# EAGLE board multiMicro_base_64pin (EAGLE 6.1)
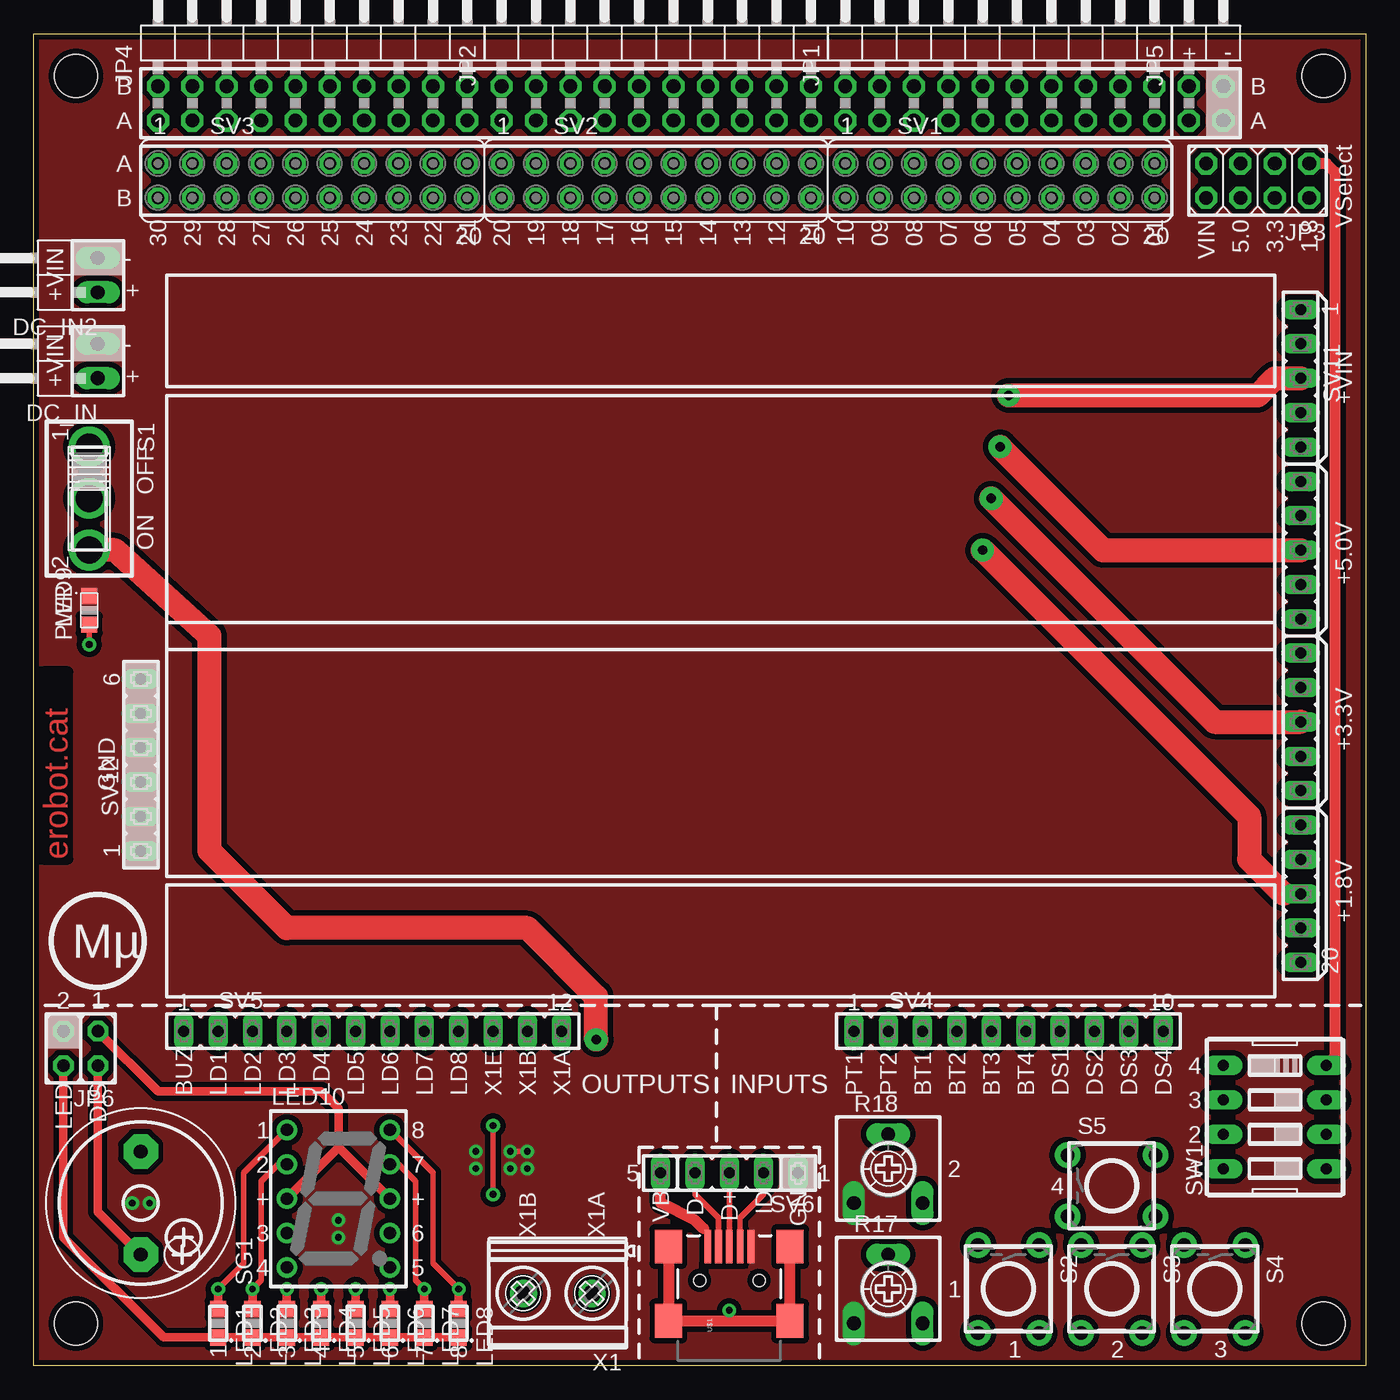
[diagram p0: board, top side]
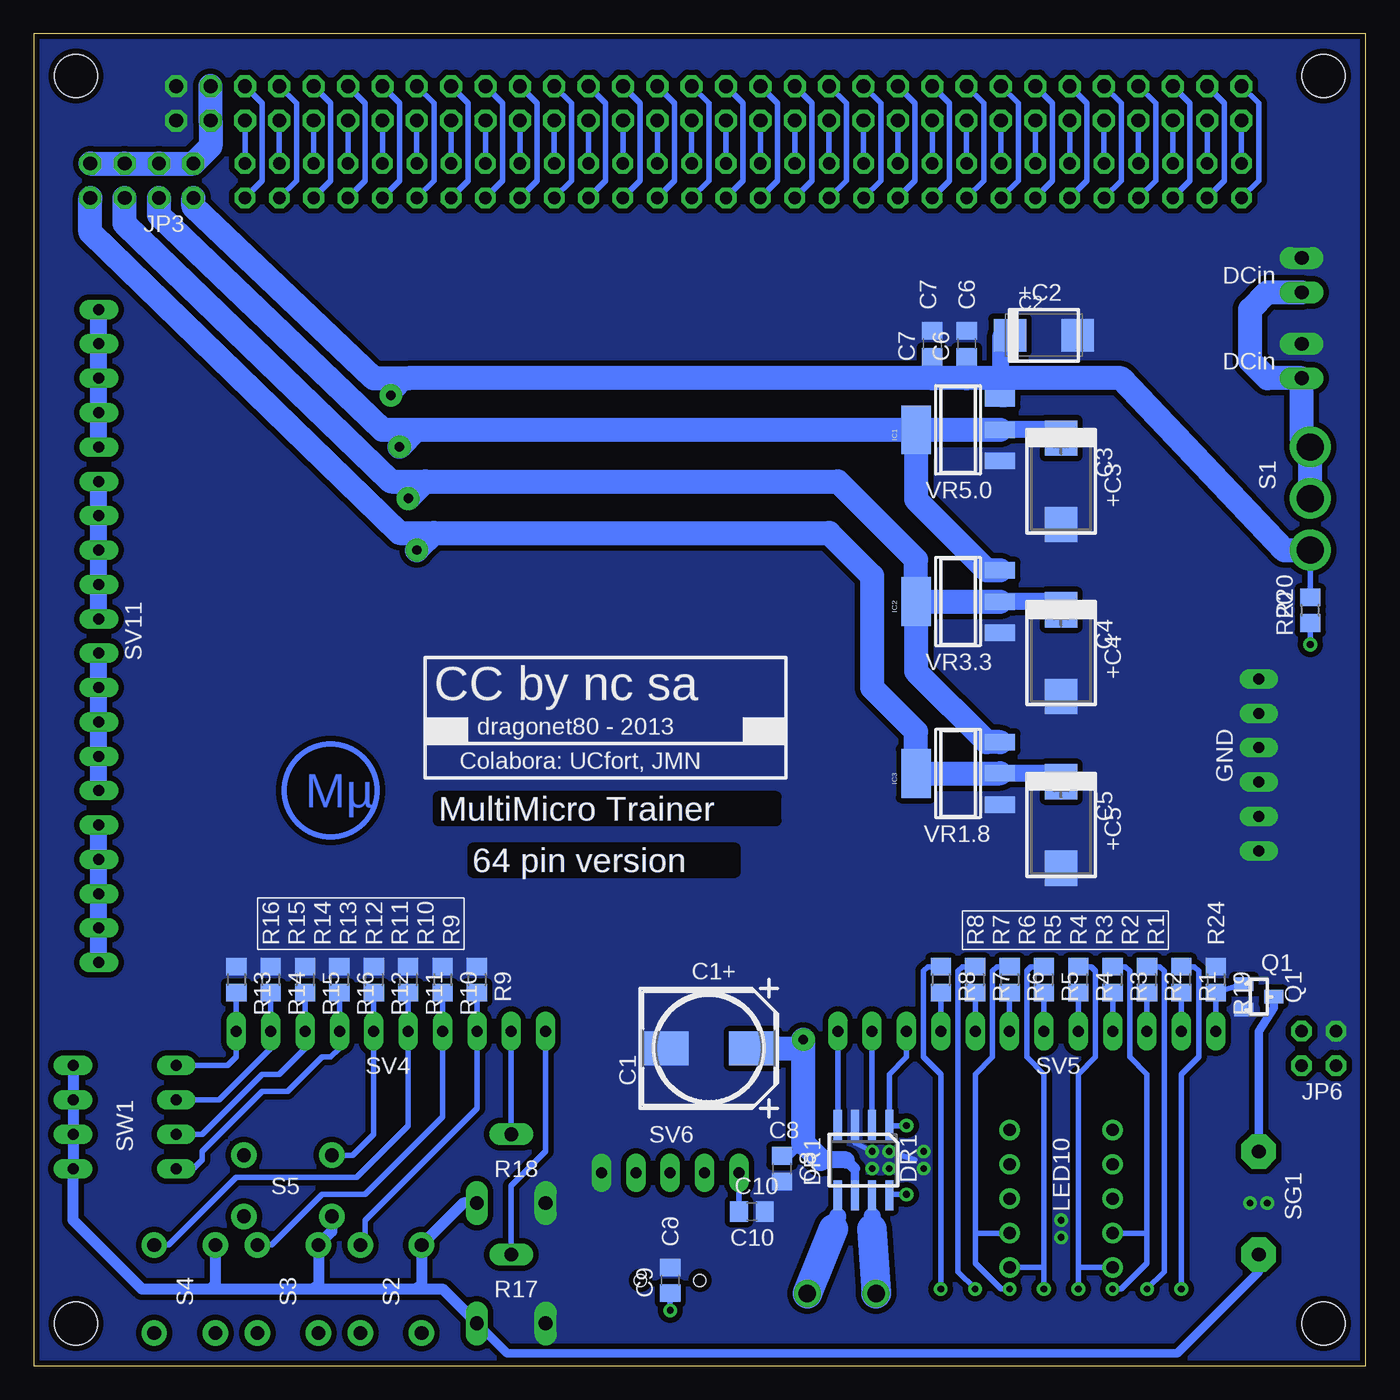
[diagram p1: board, bottom side, seen from below]

Size 98.44 x 98.44 mm. Coordinates in mm from the lower left corner, seen from the top.
Outline: 0,98.44 98.44,98.44 98.44,0 0,0 0,98.44
Copper layers (1*16): Top 0.035mm / dielectric 1.5mm / Bottom 0.035mm
Design rules: minimum track width 8mil, minimum drill 20mil, track to track 8mil, track to pad 8mil, pad to pad 8mil, via to via 8mil, smd to smd 8mil, copper to edge 10mil, drill to drill 8mil, minimum pad ring 12mil, minimum via ring 10mil, stop-mask expansion 4mil, vias tented up to drill 25mil, thermal gap 10mil
Holes 3.2 mm at 3.12,3.12 3.12,95.31 95.31,3.12 95.31,95.31

## Footprints (pad centres in the part's own frame; a part is rotated, then mirrored left to right if it is on the bottom)
140CLH-0810 = smd 3.5 x 2.5: + 3.25,0; - -3.25,0
SMC_C = smd 2.4 x 2.4: + -2.5,0; - 2.5,0
CT7343 = smd 2.6 x 2.4: + -3.2,0; - 3.2,0
C0805 = smd 1.3 x 1.5: 1 -0.95,0; 2 0.95,0
1X02/90 = drill 1.016 long: 1 -1.27,-3.81; 2 1.27,-3.81
SOIC08 = smd 0.6 x 2.2: 1 -1.905,-2.6; 2 -0.635,-2.6; 3 0.635,-2.6; 4 1.905,-2.6; 5 1.905,2.6; 6 0.635,2.6; 7 -0.635,2.6; 8 -1.905,2.6
SOT223 = smd 1.219 x 2.235: 1 -2.311,-3.099; 2 0,-3.099; 3 2.311,-3.099 | smd 3.6 x 2.2: 4 0,3.099
2X10/90 = drill 1.016 octagon: 1 -11.43,-6.35; 2 -11.43,-3.81; 3 -8.89,-6.35; 4 -8.89,-3.81; 5 -6.35,-6.35; 6 -6.35,-3.81; 7 -3.81,-6.35; 8 -3.81,-3.81; 9 -1.27,-6.35; 10 -1.27,-3.81; 11 1.27,-6.35; 12 1.27,-3.81; 13 3.81,-6.35; 14 3.81,-3.81; 15 6.35,-6.35; 16 6.35,-3.81; 17 8.89,-6.35; 18 8.89,-3.81; 19 11.43,-6.35; 20 11.43,-3.81
2X04 = drill 1.016 octagon: 1 -3.81,-1.27; 2 -3.81,1.27; 3 -1.27,-1.27; 4 -1.27,1.27; 5 1.27,-1.27; 6 1.27,1.27; 7 3.81,-1.27; 8 3.81,1.27
2X02/90 = drill 1.016 octagon: 1 -1.27,-6.35; 2 -1.27,-3.81; 3 1.27,-6.35; 4 1.27,-3.81
JP2Q = drill 0.914 octagon: 1 -1.27,-1.27; 2 -1.27,1.27; 3 1.27,-1.27; 4 1.27,1.27
CHIP-LED0805 = smd 1.2 x 1.2: A 0,-1.05; C 0,1.05
SA39-11SRWA = drill 0.9 pad 1.5: 1 -3.81,5.08; 2 -3.81,2.54; 3 -3.81,0; 4 -3.81,-2.54; 5 -3.81,-5.08; 6 3.81,-5.08; 7 3.81,-2.54; 8 3.81,0; 9 3.81,2.54; 10 3.81,5.08
SOT23 = smd 1 x 1.4: 1 -0.95,-1.1; 2 0.95,-1.1; 3 0,1.1
R0805 = smd 1.3 x 1.5: 1 -0.95,0; 2 0.95,0
CA6V = drill 1.016 long: A -2.54,-2.54; E 2.54,-2.54; S 0,2.54
255SB = drill 2: 1 -3.81,0; 2 0,0; 3 3.81,0
TACTILE-PTH = drill 1.016 pad 1.88: 1 -3.251,2.261; 2 3.251,2.261; 3 -3.251,-2.261; 4 3.251,-2.261
F/CM12P = drill 1.016 pad 2.54 octagon: + 3.81,0; - -3.81,0
FE10-2 = drill 0.914 octagon: 1 -11.43,1.27; 2 -11.43,-1.27; 3 -8.89,1.27; 4 -8.89,-1.27; 5 -6.35,1.27; 6 -6.35,-1.27; 7 -3.81,1.27; 8 -3.81,-1.27; 9 -1.27,1.27; 10 -1.27,-1.27; 11 1.27,1.27; 12 1.27,-1.27; 13 3.81,1.27; 14 3.81,-1.27; 15 6.35,1.27; 16 6.35,-1.27; 17 8.89,1.27; 18 8.89,-1.27; 19 11.43,1.27; 20 11.43,-1.27
FE10 = drill 0.813 long: 1 -11.43,0; 2 -8.89,0; 3 -6.35,0; 4 -3.81,0; 5 -1.27,0; 6 1.27,0; 7 3.81,0; 8 6.35,0; 9 8.89,0; 10 11.43,0
FE12 = drill 0.813 long: 1 -13.97,0; 2 -11.43,0; 3 -8.89,0; 4 -6.35,0; 5 -3.81,0; 6 -1.27,0; 7 1.27,0; 8 3.81,0; 9 6.35,0; 10 8.89,0; 11 11.43,0; 12 13.97,0
FE05-1 = drill 0.813 long: 1 -5.08,0; 2 -2.54,0; 3 0,0; 4 2.54,0; 5 5.08,0
FE20 = drill 0.813 long: 1 -24.13,0; 2 -21.59,0; 3 -19.05,0; 4 -16.51,0; 5 -13.97,0; 6 -11.43,0; 7 -8.89,0; 8 -6.35,0; 9 -3.81,0; 10 -1.27,0; 11 1.27,0; 12 3.81,0; 13 6.35,0; 14 8.89,0; 15 11.43,0; 16 13.97,0; 17 16.51,0; 18 19.05,0; 19 21.59,0; 20 24.13,0
FE06 = drill 0.813 long: 1 -6.35,0; 2 -3.81,0; 3 -1.27,0; 4 1.27,0; 5 3.81,0; 6 6.35,0
EDG-04 = drill 0.813 long: 1 -3.81,-3.81; 2 -1.27,-3.81; 3 1.27,-3.81; 4 3.81,-3.81; 5 3.81,3.81; 6 1.27,3.81; 7 -1.27,3.81; 8 -3.81,3.81
USB-MINIB = smd 2.5 x 0.5: D+ 2.5,0; D- 2.5,0.8; GND 2.5,-1.6; ID 2.5,-0.8; VBUS 2.5,1.6 | smd 2.5 x 2: MTN1 -3,4.5; MTN2 2.5,4.5; MTN3 -3,-4.5; MTN4 2.5,-4.5 | hole 0.9: 0,2.2; 0,-2.2
MKDSN1,5/2-5,08 = drill 1.3 pad 2: 1 -2.561,0.025; 2 2.519,0.025

## Placement (x,y rotation side)
C1  [140CLH-0810]  48.55,23.45 0 bottom
C2  10uF  [SMC_C]  23.78,76.16 0 bottom
C3  100uF  [CT7343]  22.51,65.36 270 bottom
C4  100uF  [CT7343]  22.51,52.66 270 bottom
C5  100uF  [CT7343]  22.51,39.96 270 bottom
C6  100nF  [C0805]  29.49,75.52 90 bottom
C7  33pF  [C0805]  32.03,75.52 90 bottom
C8  100nF  [C0805]  43.15,14.56 270 bottom
C9  10nF  [C0805]  51.4,6.31 90 bottom
C10  100nF  [C0805]  45.37,11.39 0 bottom
DC_IN  [1X02/90]  0.92,74.25 90 top
DC_IN2  [1X02/90]  0.92,80.6 90 top
DR1  MCP14E4  [SOIC08]  37.12,15.2 180 bottom
IC1  [SOT223]  30.13,69.17 90 bottom
IC2  [SOT223]  30.13,56.47 90 bottom
IC3  [SOT223]  30.13,43.77 90 bottom
JP1  [2X10/90]  71.41,98.38 0 top
JP2  [2X10/90]  46,98.38 0 top
JP3  [2X04]  90.46,87.59 180 top
JP4  [2X10/90]  20.6,98.38 0 top
JP5  [2X02/90]  86.65,98.38 0 top
JP6  [JP2Q]  3.46,23.45 180 top
LED1  [CHIP-LED0805]  13.62,3.13 180 top
LED2  [CHIP-LED0805]  16.16,3.13 180 top
LED3  [CHIP-LED0805]  18.7,3.13 180 top
LED4  [CHIP-LED0805]  21.24,3.13 180 top
LED5  [CHIP-LED0805]  23.78,3.13 180 top
LED6  [CHIP-LED0805]  26.32,3.13 180 top
LED7  [CHIP-LED0805]  28.86,3.13 180 top
LED8  [CHIP-LED0805]  31.4,3.13 180 top
LED9  [CHIP-LED0805]  4.1,55.84 0 top
LED10  7-SEG_SA39-11SRWA  [SA39-11SRWA]  22.51,12.34 0 top
Q1  BSS123  [SOT23]  7.91,27.26 270 bottom
R1  1K  [R0805]  13.62,28.53 270 bottom
R2  1K  [R0805]  16.16,28.53 270 bottom
R3  1K  [R0805]  18.7,28.53 270 bottom
R4  1K  [R0805]  21.24,28.53 270 bottom
R5  1K  [R0805]  23.78,28.53 270 bottom
R6  1K  [R0805]  26.32,28.53 270 bottom
R7  1K  [R0805]  28.86,28.53 270 bottom
R8  1K  [R0805]  31.4,28.53 270 bottom
R9  10K  [R0805]  65.69,28.53 270 bottom
R10  10K  [R0805]  68.23,28.53 270 bottom
R11  10K  [R0805]  70.77,28.53 270 bottom
R12  10K  [R0805]  73.31,28.53 270 bottom
R13  10K  [R0805]  83.47,28.53 270 bottom
R14  10K  [R0805]  80.93,28.53 270 bottom
R15  10K  [R0805]  78.39,28.53 270 bottom
R16  10K  [R0805]  75.85,28.53 270 bottom
R17  10K  [CA6V]  63.15,5.67 0 top
R18  10K  [CA6V]  63.15,14.56 0 top
R19  10K  [R0805]  11.08,28.53 270 bottom
R20  1K  [R0805]  4.1,55.84 90 bottom
S1  [255SB]  4.1,64.09 270 top
S2  [TACTILE-PTH]  72.04,5.67 270 top
S3  [TACTILE-PTH]  79.66,5.67 270 top
S4  [TACTILE-PTH]  87.28,5.67 270 top
S5  [TACTILE-PTH]  79.66,13.29 0 top
SG1  F/CM12P  [F/CM12P]  7.91,12.02 270 top
SV1  [FE10-2]  71.41,87.59 0 top
SV2  [FE10-2]  46,87.59 0 top
SV3  [FE10-2]  20.6,87.59 0 top
SV4  [FE10]  72.04,24.72 0 top
SV5  [FE12]  25.05,24.72 0 top
SV6  [FE05-1]  51.4,14.24 180 top
SV11  [FE20]  93.63,53.93 270 top
SV12  [FE06]  7.91,44.41 90 top
SW1  [EDG-04]  91.73,18.37 90 top
U$1  USB-MINIB-5PIN  [USB-MINIB]  51.4,6.31 90 top
X1  MKDSN1,5/2-5,08  [MKDSN1,5/2-5,08]  38.7,5.35 180 top

## Library data of the parts
C1-C10 R1-R16 R19 R20 = rcl
DC_IN DC_IN2 JP1-JP5 = pinhead
DR1 = ic-package
IC1-IC3 S2-S5 = SparkFun
JP6 = jumper
LED1-LED9 = led
LED10 = display-kingbright; OC_FARNELL: unknown; OC_NEWARK: unknown
Q1 = transistor-small-signal
R17 R18 = pot
S1 = switch
SG1 = buzzer; OC_FARNELL: unknown; OC_NEWARK: unknown
SV1-SV6 SV11 SV12 = con-lsta; OC_FARNELL: unknown; OC_NEWARK: unknown
SW1 = special
U$1 = SparkFun-Connectors
X1 = con-phoenix-508; MPN: MKDSN 1,5/2-5.08; OC_FARNELL: 1792903; OC_NEWARK: 30M2397

## Nets
+3V3: C4.+ IC2.2 IC2.4 IC3.3 JP3.4 SV11.11 SV11.12 SV11.13 SV11.14 SV11.15
+5V: C3.+ IC1.2 IC1.4 IC2.3 JP3.6 SV11.6 SV11.7 SV11.8 SV11.9 SV11.10
+18V: C5.+ IC3.2 IC3.4 JP3.2 SV11.16 SV11.17 SV11.18 SV11.19 SV11.20
+UB: JP3.1 JP3.3 JP3.5 JP3.7 JP5.1 JP5.2 JP6.2 R17.E R18.E S2.3 S3.3 S4.3 S5.3 SG1.+ SW1.1 SW1.2 SW1.3 SW1.4
N$1: LED1.A LED10.1 R1.1
N$2: LED2.A LED10.2 R2.1
N$3: LED3.A LED10.4 R3.1
N$4: LED4.A LED10.5 R4.1
N$5: R2.2 SV5.3
N$6: R3.2 SV5.4
N$7: R1.2 SV5.2
N$8: R4.2 SV5.5
N$9: LED9.A R20.1
N$10: R18.S SV4.2
N$11: DR1.5 X1.1
N$12: DR1.7 X1.2
N$13: DR1.2 SV5.11
N$14: DR1.4 SV5.12
N$15: DR1.1 DR1.8 SV5.10
N$16: JP6.4 LED1.C LED2.C LED3.C LED4.C LED5.C LED6.C LED7.C LED8.C
N$17: JP6.1 LED10.3 LED10.8
N$18: Q1.3 SG1.-
N$19: SV6.2 U$1.ID
N$20: LED5.A LED10.6 R5.1
N$21: C9.1 U$1.MTN1 U$1.MTN2 U$1.MTN3 U$1.MTN4
N$22: SV6.3 U$1.D+
N$23: SV6.4 U$1.D-
N$24: C10.1 SV6.5 U$1.VBUS
N$42: DC_IN2.1 DC_IN.1 S1.1 S1.2
N$44: LED6.A LED10.7 R6.1
N$45: LED7.A LED10.9 R7.1
N$46: LED8.A LED10.10 R8.1
N$47: R9.2 S2.1 SV4.3
N$48: R10.2 S3.1 SV4.4
N$49: R11.2 S4.1 SV4.5
N$50: R12.2 S5.1 SV4.6
N$55: Q1.1 R19.2 SV5.1
N$57: R17.S SV4.1
N$62: R6.2 SV5.7
N$63: R7.2 SV5.8
N$64: R5.2 SV5.6
N$65: R8.2 SV5.9
N$147: R13.2 SV4.10 SW1.5
N$148: R14.2 SV4.9 SW1.6
N$149: R15.2 SV4.8 SW1.7
N$150: R16.2 SV4.7 SW1.8
P01: JP1.1 SV1.1
P02: JP1.2 SV1.2
P04: JP1.3 SV1.3
P05: JP1.4 SV1.4
P07: JP1.5 SV1.5
P08: JP1.6 SV1.6
P10: JP1.7 SV1.7
P11: JP1.8 SV1.8
P13: JP1.9 SV1.9
P14: JP1.10 SV1.10
P16: JP1.11 SV1.11
P17: JP1.12 SV1.12
P19: JP1.13 SV1.13
P20: JP1.14 SV1.14
P22: JP1.15 SV1.15
P23: JP1.16 SV1.16
P25: JP1.17 SV1.17
P26: JP1.18 SV1.18
P28: JP1.19 SV1.19
P29: JP1.20 SV1.20
P31: JP2.1 SV2.1
P32: JP2.2 SV2.2
P34: JP2.3 SV2.3
P35: JP2.4 SV2.4
P37: JP2.5 SV2.5
P38: JP2.6 SV2.6
P40: JP2.7 SV2.7
P41: JP2.8 SV2.8
P43: JP2.9 SV2.9
P44: JP2.10 SV2.10
P46: JP2.11 SV2.11
P47: JP2.12 SV2.12
P49: JP2.13 SV2.13
P50: JP2.14 SV2.14
P52: JP2.15 SV2.15
P53: JP2.16 SV2.16
P55: JP2.17 SV2.17
P56: JP2.18 SV2.18
P58: JP2.19 SV2.19
P59: JP2.20 SV2.20
P61: JP4.1 SV3.1
P62: JP4.2 SV3.2
P64: JP4.3 SV3.3
P65: JP4.4 SV3.4
P67: JP4.5 SV3.5
P68: JP4.6 SV3.6
P70: JP4.7 SV3.7
P71: JP4.8 SV3.8
P73: JP4.9 SV3.9
P74: JP4.10 SV3.10
P76: JP4.11 SV3.11
P77: JP4.12 SV3.12
P79: JP4.13 SV3.13
P80: JP4.14 SV3.14
P82: JP4.15 SV3.15
P83: JP4.16 SV3.16
P85: JP4.17 SV3.17
P86: JP4.18 SV3.18
P88: JP4.19 SV3.19
P89: JP4.20 SV3.20
V+: C1.+ C2.+ C6.1 C7.1 C8.1 DR1.6 IC1.3 JP3.8 R20.2 S1.3 SV11.1 SV11.2 SV11.3 SV11.4 SV11.5
VSS: C1.- C2.- C3.- C4.- C5.- C6.2 C7.2 C8.2 C9.2 C10.2 DC_IN2.2 DC_IN.2 DR1.3 IC1.1 IC2.1 IC3.1 JP5.3 JP5.4 JP6.3 LED9.C Q1.2 R9.1 R10.1 R11.1 R12.1 R13.1 R14.1 R15.1 R16.1 R17.A R18.A R19.1 SV6.1 SV12.1 SV12.2 SV12.3 SV12.4 SV12.5 SV12.6 U$1.GND

## Tracks (layer width: path | path; a pad name or v marks a point on that pad's centre or on a via)
+3V3  (via drill 0.7 pad 1.68)
  Top 1.778: v70.77,64.09 87.28,47.58 SV11.13
  Bottom 0.406: C4.+ 22.51,56.47
  Bottom 1.27: 22.51,56.47 IC2.2 | SV11.15 SV11.14 SV11.13 SV11.12 SV11.11
  Bottom 1.778: IC2.4 IC2.2 | IC2.4 33.23,51.32 28,46.08 IC3.3 | v70.77,64.09 69.5,65.36 | 69.5,65.36 39.02,65.36 33.23,59.57 IC2.4 | 69.5,65.36 72.04,65.36 91.73,84.41 JP3.4
+5V  (via drill 0.7 pad 1.68)
  Top 1.778: v71.41,67.9 79.03,60.28 SV11.8
  Bottom 0.406: C3.+ 22.51,69.17
  Bottom 1.27: 22.51,69.17 IC1.2 | SV11.10 SV11.9 SV11.8 SV11.7 SV11.6
  Bottom 1.778: IC1.4 IC1.2 | IC1.4 33.23,64.02 28,58.78 IC2.3 | v71.41,67.9 70.14,69.17 | 70.14,69.17 IC1.4 | 70.14,69.17 72.68,69.17 89.19,85.05 JP3.6
+18V  (via drill 0.7 pad 1.68)
  Top 1.27: 92.36,34.88 SV11.18
  Top 1.778: v70.14,60.28 89.82,40.6 89.82,37.42 92.36,34.88
  Bottom 0.406: C5.+ 22.51,43.77
  Bottom 1.27: 22.51,43.77 IC3.2 | SV11.20 SV11.19 SV11.18 SV11.17 SV11.16
  Bottom 1.778: IC3.2 IC3.4 33.23,46.87 36.48,50.12 36.48,58.38 39.66,61.55 68.87,61.55 | 68.87,61.55 v70.14,60.28 | 68.87,61.55 71.41,61.55 94.27,83.78 JP3.2
+UB
  Top 0.61: SG1.+ 4.73,11.39 JP6.2
  Top 0.813: SW1.4 96.17,22.82 96.17,88.22 95.54,88.86 JP3.1
  Bottom 0.61: SG1.+ 7.91,6.94 13.94,0.91 63.47,0.91 R17.E
  Bottom 0.813: SW1.4 SW1.3 SW1.2 SW1.1 95.54,10.75 90.46,5.67 85.38,5.67 | 85.38,5.67 77.76,5.67 | 77.76,5.67 70.14,5.67 | 70.14,5.67 68.23,5.67 R17.E | 70.14,5.67 69.78,6.03 S2.3 66.68,12.02 R18.E | 77.76,5.67 77.4,6.03 S3.3 76.41,9.91 S5.3 | S4.3 85.02,6.03 85.38,5.67
  Bottom 1.778: JP3.1 JP3.3 JP3.5 JP3.7 85.38,90.13 JP5.1 JP5.2
N$1  (via drill 0.5 pad 0.61)
  Top 0.406: LED10.1 15.53,14.24 15.53,7.58 v13.62,5.67
  Top 0.61: v13.62,5.67 LED1.A
  Bottom 0.406: R1.1 12.67,29.48 12.35,29.17 12.35,22.82 13.62,21.55 v13.62,5.67
N$2  (via drill 0.5 pad 0.61)
  Top 0.406: LED10.2 18.06,14.88 16.79,13.61 16.79,6.31 v16.16,5.67
  Top 0.61: v16.16,5.67 LED2.A
  Bottom 0.406: R2.1 15.21,29.48 14.89,29.17 14.89,6.94 v16.16,5.67
N$3  (via drill 0.5 pad 0.61)
  Top 0.61: v18.7,5.67 LED3.A
  Bottom 0.406: R3.1 17.74,29.48 17.43,29.17 17.43,22.82 16.16,21.55 16.16,9.8 | 16.16,9.8 16.16,7.58 18.06,5.67 v18.7,5.67 | LED10.4 16.16,9.8
N$4  (via drill 0.5 pad 0.61)
  Top 0.61: v21.24,5.67 LED4.A
  Bottom 0.406: 21.24,7.26 v21.24,5.67 | LED10.5 21.24,7.26 | R4.1 20.29,29.48 19.97,29.17 19.97,22.82 21.24,21.55 21.24,7.26
N$5
  Bottom 0.406: R2.2 SV5.3
N$6
  Bottom 0.406: R3.2 SV5.4
N$7
  Bottom 0.406: R1.2 SV5.2
N$8
  Bottom 0.406: R4.2 SV5.5
N$9  (via drill 0.5 pad 1.02)
  Top 0.406: v4.1,53.3 LED9.A
  Bottom 0.406: R20.1 v4.1,53.3
N$10
  Bottom 0.406: R18.S SV4.2
N$11
  Bottom 0.406: DR1.5 39.02,12.02
  Bottom 0.61: 39.02,12.02 39.02,11.07
  Bottom 1.27: 39.02,11.07 39.34,10.12
  Bottom 2.184: 39.34,10.12 41.24,5.35 X1.1
N$12
  Bottom 0.61: DR1.7 36.48,11.07
  Bottom 1.27: 36.48,11.07 36.48,10.12
  Bottom 2.184: 36.48,10.12 36.16,5.35 X1.2
N$13
  Bottom 0.406: DR1.2 SV5.11
N$14
  Bottom 0.406: DR1.4 SV5.12
N$15  (via drill 0.5 pad 0.61)
  Top 0.406: v33.94,12.66 v33.94,17.74
  Bottom 0.406: DR1.1 35.21,21.55 33.94,22.82 SV5.10 | 35.15,12.66 v33.94,12.66 | 35.15,17.74 v33.94,17.74
  Bottom 0.61: DR1.8 35.15,12.66 | DR1.1 35.15,17.74
N$16
  Top 0.61: LED8.C LED7.C LED6.C LED5.C LED4.C LED3.C LED2.C LED1.C 9.59,2.08 2.19,9.48 JP6.4
N$17
  Top 0.61: LED10.3 22.51,16.15 | 22.51,16.15 LED10.8 | 22.51,16.15 22.51,19.01 21.24,20.28 9.18,20.28 JP6.1
N$18
  Bottom 0.61: Q1.3 6.81,26.46 7.91,24.72 SG1.-
N$19
  Top 0.406: U$1.ID 52.2,10.92 53.94,12.66 SV6.2
N$20  (via drill 0.5 pad 0.61)
  Top 0.61: v23.78,5.67 LED5.A
  Bottom 0.406: 23.78,7.26 v23.78,5.67 | LED10.6 23.78,7.26 | R5.1 24.73,29.48 25.05,29.17 25.05,22.82 23.78,21.55 23.78,7.26
N$21  (via drill 0.5 pad 0.61)
  Top 0.406: v51.4,4.09 51.4,3.13 51.55,3.13 51.72,3.31
  Top 0.813: U$1.MTN4 U$1.MTN3 51.72,3.31 U$1.MTN1 U$1.MTN2
  Bottom 0.406: C9.1 v51.4,4.09
N$22
  Top 0.406: U$1.D+ SV6.3
N$23
  Top 0.406: U$1.D- 50.6,10.92 48.86,12.66 SV6.4
N$24
  Top 0.406: U$1.VBUS 49.8,9.81 49.5,10.12
  Top 0.813: 49.5,10.12 48.86,10.75 46.32,12.02 SV6.5
  Bottom 0.406: C10.1 SV6.5
N$42
  Bottom 1.778: S1.2 S1.1 4.73,68.54 DC_IN.1 7.27,72.98 8.54,74.25 8.54,78.06 7.27,79.33 DC_IN2.1
N$44  (via drill 0.5 pad 0.61)
  Top 0.61: v26.32,5.67 LED6.A
  Bottom 0.406: R6.1 27.27,29.48 27.59,29.17 27.59,22.82 28.86,21.55 28.86,9.8 | 28.86,9.8 28.86,7.58 26.95,5.67 v26.32,5.67 | LED10.7 28.86,9.8
N$45  (via drill 0.5 pad 0.61)
  Top 0.406: LED10.9 26.95,14.88 28.22,13.61 28.22,6.31 v28.86,5.67
  Top 0.61: v28.86,5.67 LED7.A
  Bottom 0.406: R7.1 29.81,29.48 30.13,29.17 30.13,6.94 v28.86,5.67
N$46  (via drill 0.5 pad 0.61)
  Top 0.406: LED10.10 29.49,14.24 29.49,7.58 v31.4,5.67
  Top 0.61: v31.4,5.67 LED8.A
  Bottom 0.406: R8.1 32.35,29.48 32.67,29.17 32.67,22.82 31.4,21.55 v31.4,5.67
N$47
  Bottom 0.406: R9.2 SV4.3 65.69,19.01 73.95,10.75 73.95,9.48 74.3,9.13 S2.1
N$48
  Bottom 0.406: R10.2 SV4.4 68.23,18.37 73.95,12.66 77.12,12.66 80.85,8.92 S3.1
N$49
  Bottom 0.406: R11.2 SV4.5 70.77,17.74 74.58,13.93 83.47,13.93 88.47,8.92 S4.1
N$50
  Bottom 0.406: R12.2 SV4.6 73.31,17.1 74.86,15.55 S5.1
N$55
  Bottom 0.406: SV5.1 R19.2 Q1.1
N$57
  Bottom 0.406: R17.S 63.15,13.29 60.61,15.83 SV4.1
N$62
  Bottom 0.406: R6.2 SV5.7
N$63
  Bottom 0.406: R7.2 SV5.8
N$64
  Bottom 0.406: R5.2 SV5.6
N$65
  Bottom 0.406: R8.2 SV5.9
N$147
  Bottom 0.406: R13.2 SV4.10 83.47,22.82 84.11,22.18 SW1.5
N$148
  Bottom 0.406: R14.2 SV4.9 80.93,23.45 84.74,19.64 SW1.6
N$149
  Bottom 0.406: R15.2 SV4.8 78.39,23.45 80.3,21.55 81.57,21.55 86.01,17.1 SW1.7
N$150
  Bottom 0.406: R16.2 SV4.7 75.85,23.45 76.48,22.82 77.12,22.82 79.66,20.28 81.57,20.28 86.01,15.83 86.01,15.2 86.65,14.56 SW1.8
P01
  Bottom 0.406: JP1.1 SV1.1
P02
  Bottom 0.406: JP1.2 58.7,93.3 58.7,87.59 SV1.2
P04
  Bottom 0.406: JP1.3 SV1.3
P05
  Bottom 0.406: JP1.4 61.24,93.3 61.24,87.59 SV1.4
P07
  Bottom 0.406: JP1.5 SV1.5
P08
  Bottom 0.406: JP1.6 63.79,93.3 63.79,87.59 SV1.6
P10
  Bottom 0.406: JP1.7 SV1.7
P11
  Bottom 0.406: JP1.8 66.33,93.3 66.33,87.59 SV1.8
P13
  Bottom 0.406: JP1.9 SV1.9
P14
  Bottom 0.406: JP1.10 68.87,93.3 68.87,87.59 SV1.10
P16
  Bottom 0.406: JP1.11 SV1.11
P17
  Bottom 0.406: JP1.12 71.41,93.3 71.41,87.59 SV1.12
P19
  Bottom 0.406: JP1.13 SV1.13
P20
  Bottom 0.406: JP1.14 73.95,93.3 73.95,87.59 SV1.14
P22
  Bottom 0.406: JP1.15 SV1.15
P23
  Bottom 0.406: JP1.16 76.48,93.3 76.48,87.59 SV1.16
P25
  Bottom 0.406: JP1.17 SV1.17
P26
  Bottom 0.406: JP1.18 79.03,93.3 79.03,87.59 SV1.18
P28
  Bottom 0.406: JP1.19 SV1.19
P29
  Bottom 0.406: JP1.20 81.57,93.3 81.57,87.59 SV1.20
P31
  Bottom 0.406: JP2.1 SV2.1
P32
  Bottom 0.406: JP2.2 33.3,93.3 33.3,87.59 SV2.2
P34
  Bottom 0.406: JP2.3 SV2.3
P35
  Bottom 0.406: JP2.4 35.84,93.3 35.84,87.59 SV2.4
P37
  Bottom 0.406: JP2.5 SV2.5
P38
  Bottom 0.406: JP2.6 38.38,93.3 38.38,87.59 SV2.6
P40
  Bottom 0.406: JP2.7 SV2.7
P41
  Bottom 0.406: JP2.8 40.92,93.3 40.92,87.59 SV2.8
P43
  Bottom 0.406: JP2.9 SV2.9
P44
  Bottom 0.406: JP2.10 43.46,93.3 43.46,87.59 SV2.10
P46
  Bottom 0.406: JP2.11 SV2.11
P47
  Bottom 0.406: JP2.12 46,93.3 46,87.59 SV2.12
P49
  Bottom 0.406: JP2.13 SV2.13
P50
  Bottom 0.406: JP2.14 48.55,93.3 48.55,87.59 SV2.14
P52
  Bottom 0.406: JP2.15 SV2.15
P53
  Bottom 0.406: JP2.16 51.09,93.3 51.09,87.59 SV2.16
P55
  Bottom 0.406: JP2.17 SV2.17
P56
  Bottom 0.406: JP2.18 53.62,93.3 53.62,87.59 SV2.18
P58
  Bottom 0.406: JP2.19 SV2.19
P59
  Bottom 0.406: JP2.20 56.16,93.3 56.16,87.59 SV2.20
P61
  Bottom 0.406: JP4.1 SV3.1
P62
  Bottom 0.406: JP4.2 7.91,93.3 7.91,87.59 SV3.2
P64
  Bottom 0.406: JP4.3 SV3.3
P65
  Bottom 0.406: JP4.4 10.45,93.3 10.45,87.59 SV3.4
P67
  Bottom 0.406: JP4.5 SV3.5
P68
  Bottom 0.406: JP4.6 12.99,93.3 12.99,87.59 SV3.6
P70
  Bottom 0.406: JP4.7 SV3.7
P71
  Bottom 0.406: JP4.8 15.53,93.3 15.53,87.59 SV3.8
P73
  Bottom 0.406: JP4.9 SV3.9
P74
  Bottom 0.406: JP4.10 18.06,93.3 18.06,87.59 SV3.10
P76
  Bottom 0.406: JP4.11 SV3.11
P77
  Bottom 0.406: JP4.12 20.6,93.3 20.6,87.59 SV3.12
P79
  Bottom 0.406: JP4.13 SV3.13
P80
  Bottom 0.406: JP4.14 23.14,93.3 23.14,87.59 SV3.14
P82
  Bottom 0.406: JP4.15 SV3.15
P83
  Bottom 0.406: JP4.16 25.68,93.3 25.68,87.59 SV3.16
P85
  Bottom 0.406: JP4.17 SV3.17
P86
  Bottom 0.406: JP4.18 28.22,93.3 28.22,87.59 SV3.18
P88
  Bottom 0.406: JP4.19 SV3.19
P89
  Bottom 0.406: JP4.20 30.76,93.3 30.76,87.59 SV3.20
V+  (via drill 0.7 pad 1.68)
  Top 1.778: v72.04,71.71 90.46,71.71 91.73,72.98 SV11.3 | v41.56,24.09 41.56,27.26 36.48,32.34 18.7,32.34 12.99,38.06 12.99,53.93 6,60.28 S1.3
  Bottom 0.406: C2.+ 26.95,76.16 | R20.2 S1.3 | C6.1 29.49,72.98 | C7.1 32.03,72.98 | C8.1 42.52,15.51 41.56,16.47
  Bottom 0.61: DR1.6 37.75,14.56
  Bottom 0.813: 37.75,14.56 38.38,15.2
  Bottom 1.27: 70.77,72.98 v72.04,71.71 | 26.95,76.16 26.95,72.98 26.95,72.35 26.55,71.48 IC1.3 | SV11.5 SV11.4 SV11.3 SV11.2 SV11.1 | 38.38,15.2 40.29,15.2
  Bottom 1.676: 40.29,15.2 41.56,16.47
  Bottom 1.778: S1.3 6,60.28 18.06,72.98 26.95,72.98 29.49,72.98 32.03,72.98 70.77,72.98 73.31,72.98 86.65,85.68 JP3.8 | 41.56,16.47 41.56,23.45 | 41.56,23.45 v41.56,24.09 | C1.+ 41.56,23.45
VSS  (via drill 0.5 pad 0.61)
  Top 0.406: v36.48,15.83 v35.21,15.83
  Bottom 0.406: DR1.3 37.75,16.47 v36.48,15.83 | v35.21,15.83 33.3,15.2
  other vias: 36.48,14.56 35.21,14.56 7.27,12.02 22.51,9.48 32.67,15.83 32.67,14.56 22.51,10.75 8.54,12.02
  pour Bottom (isolate 0.406, no thermals): -0.35,-0.68 98.71,-0.68 98.71,99.02 -0.35,99.02
  pour Top (isolate 0.406, no thermals): -0.35,-0.68 98.71,-0.68 98.71,99.02 -0.35,99.02
(copper drawn outside any net)
  shapes: Bottom circle x1

## Text on the board
Top: erobot.cat
Bottom: Mµ | MultiMicro Trainer | 64 pin version
_tsilk: + | - | B | B | A | A | A | B | 30 | 29 | 28 | 27 | 26 | 25 | 24 | 23 | 22 | 21 | 20 | 19 | 18 | 17 | 16 | 15 | 14 | 13 | 12 | 11 | 10 | 09 | 08 | 07 | 06 | 05 | 04 | 03 | 02 | 01 | VIN | 5.0 | 3.3 | 1.8 | VSelect | - | + | +VIN | - | + | +VIN | +VIN | OFF | ON | PWR | +5.0V | +3.3V | GND | +1.8V | Mµ | 4 | LED | DIS | OUTPUTS | INPUTS | BUZ | LD1 | LD2 | LD3 | LD4 | LD5 | LD6 | LD7 | LD8 | X1E | X1B | X1A | PT1 | PT2 | BT1 | BT2 | BT3 | BT4 | DS1 | DS2 | DS3 | DS4 | 3 | 1 | 2 | 8 | 2 | 2 | 1 | 7 | 4 | + | VB | D- | D+ | ID | GN | + | 3 | 6 | X1B | X1A | 4 | 5 | 1 | 1 | 2 | 3 | 1 | 2 | 3 | 4 | 5 | 6 | 7 | 8
_bsilk: JP3 | DCin | +C2 | C6 | C7 | DCin | VR5.0 | S1 | +C3 | SV11 | R20 | VR3.3 | +C4 | CC by nc sa | dragonet80 - 2013 | Colabora: UCfort, JMN | GND | MultiMicro Trainer | +C5 | VR1.8 | 64 pin version | R24 | R1 | R2 | R3 | R4 | R5 | R6 | R7 | R8 | R9 | R10 | R11 | R12 | R13 | R14 | R15 | R16 | Q1 | C1+ | SV5 | SV4 | JP6 | SW1 | C8 | SV6 | R18 | DR1 | S5 | LED10 | C9 | SG1 | C10 | R17 | S2 | S3 | S4